# EAGLE board All-in-one Starter Kit for Micro：bit V1.0(1) (EAGLE 9.6.2)
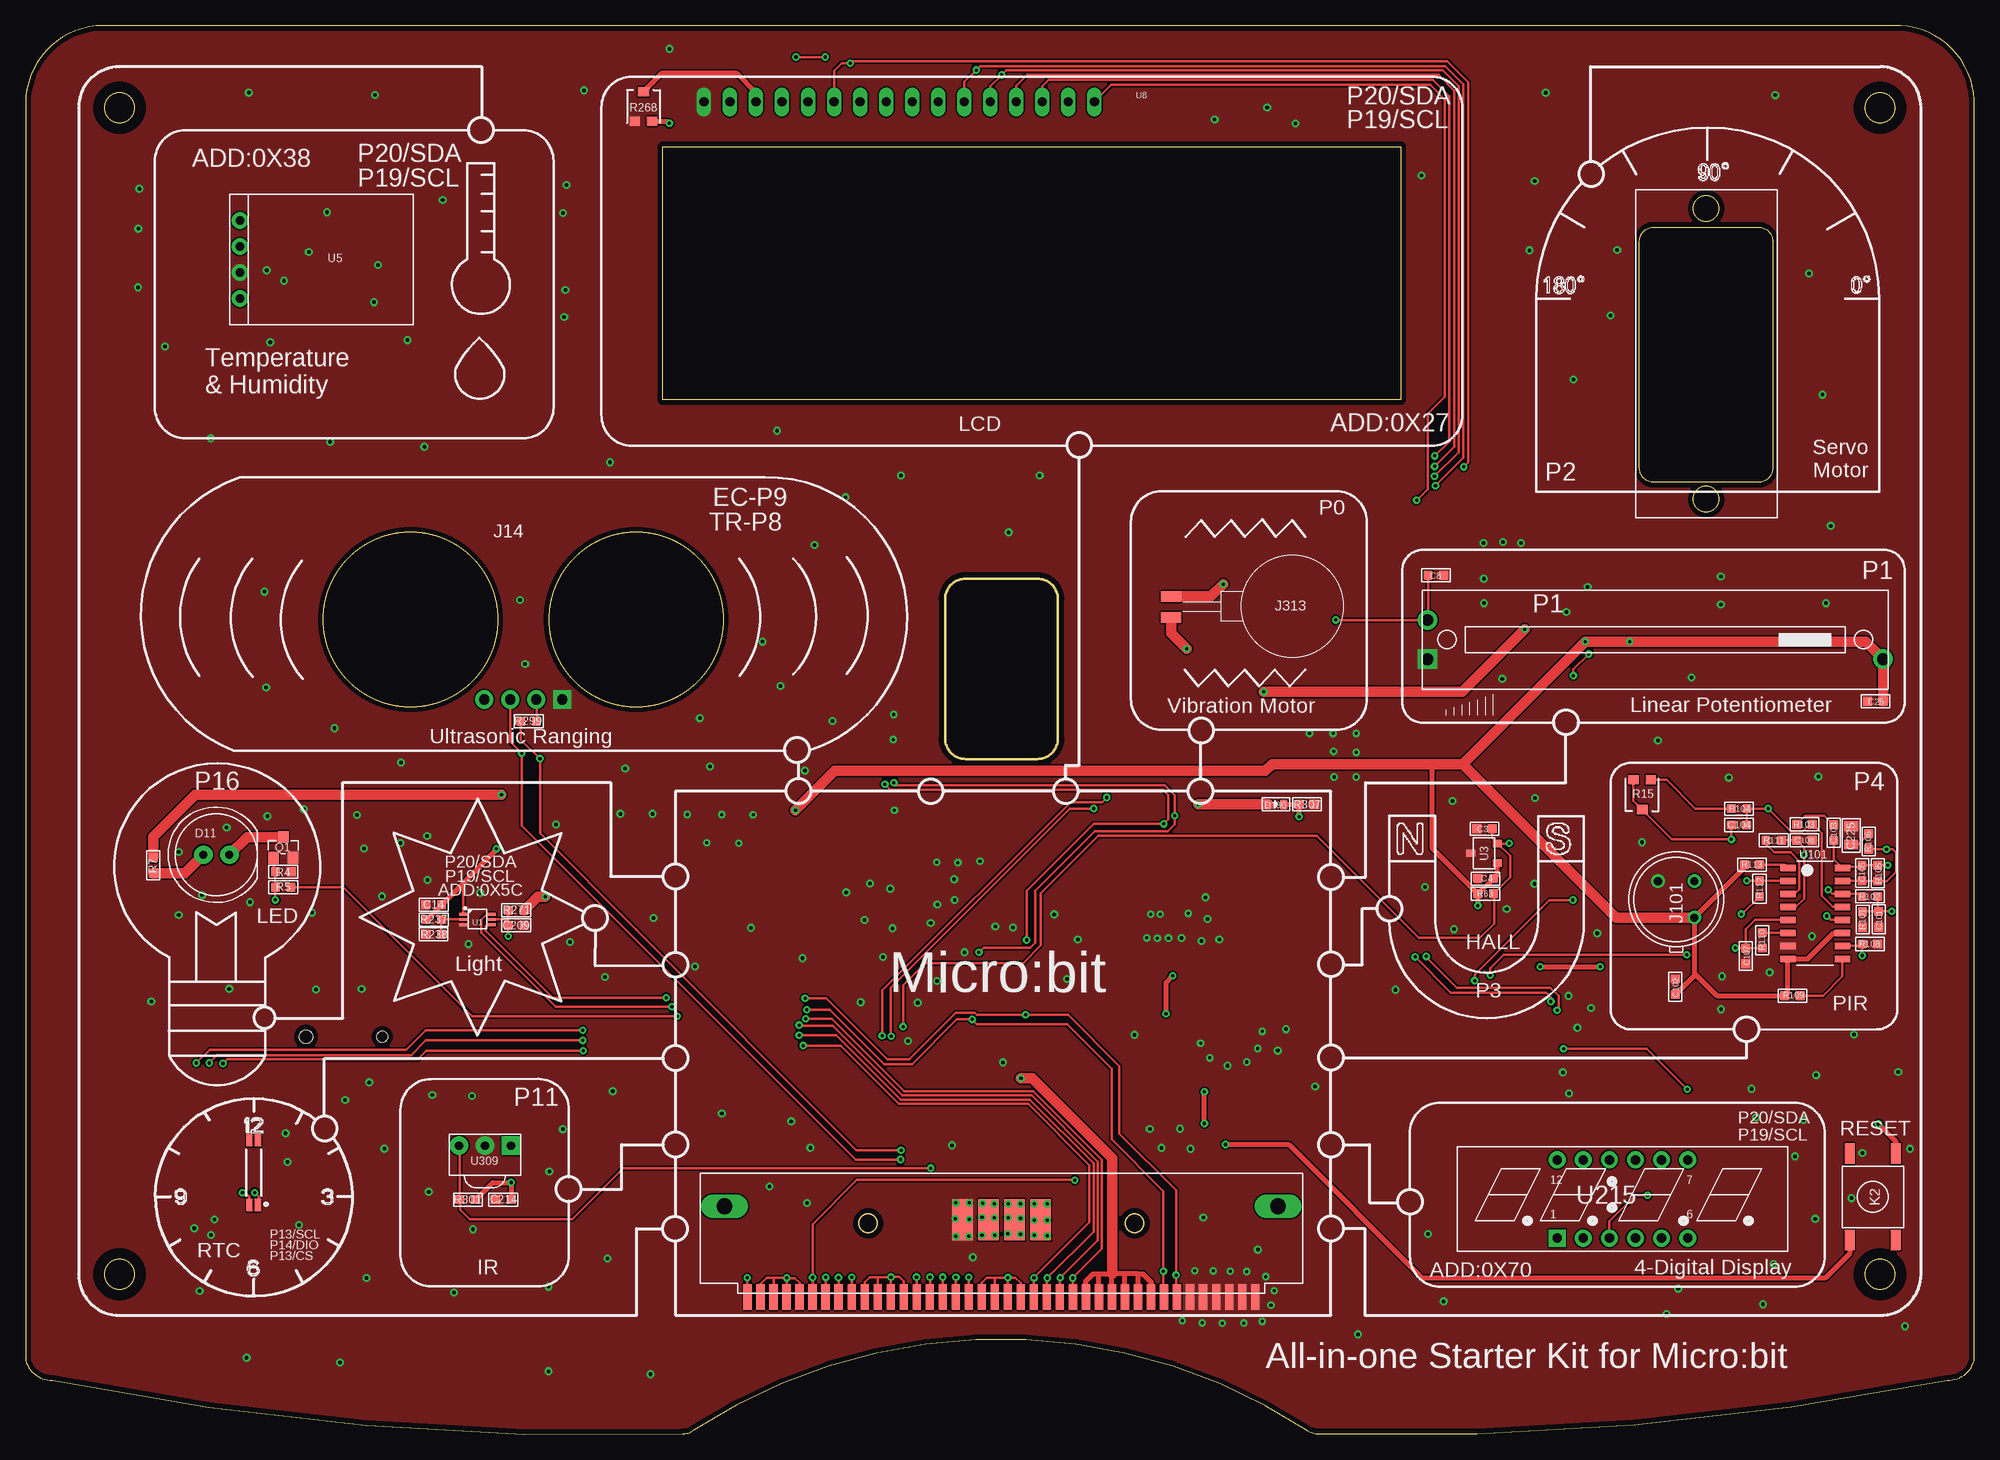
[diagram p0: board, top side]
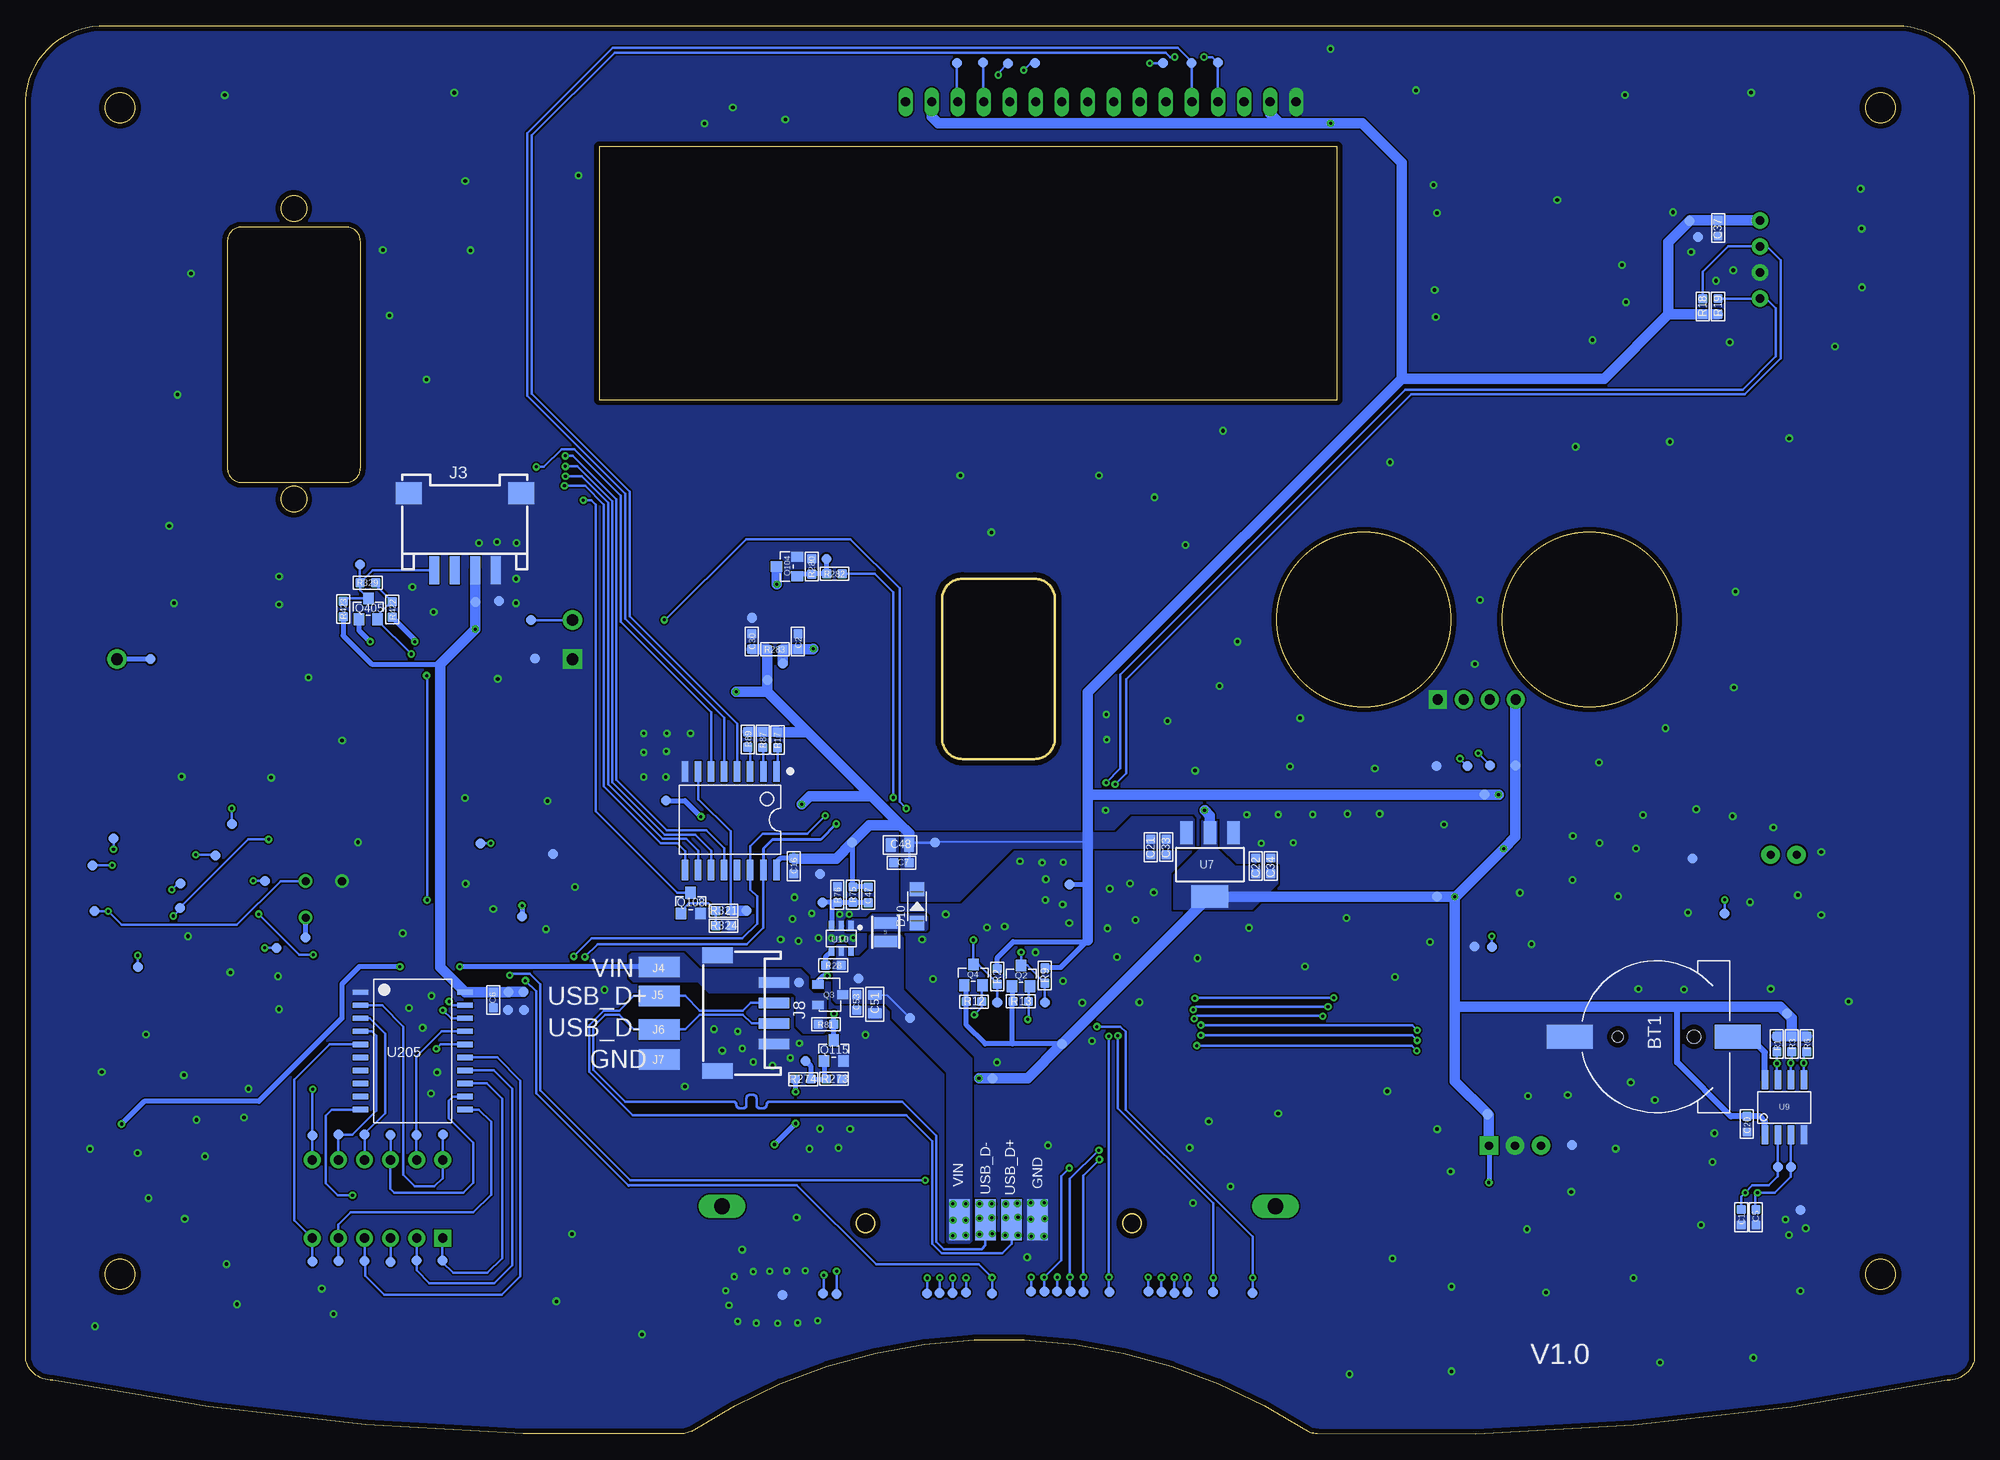
[diagram p1: board, bottom side, seen from below]

Size 190.12 x 137.4 mm. Coordinates in mm from the lower left corner, seen from the top.
Outline: 190.12,7.17 190.12,129.4 arc90 182.92,137.4 7.59,137.4 arc90 0,129.81 0,7.17 arc74 2.63,5.24 arc13 64.11,0.02 arc30 65.1,0.3 arc-66 125.16,0.28 arc30 126.16,0.02 arc13 187.46,5.24 arc74 190.12,7.17
Outline: 170.45,116.35 170.45,94.25 arc-90 169.05,92.85 158.85,92.85 arc-90 157.45,94.25 157.45,116.35 arc-90 158.85,117.75 169.05,117.75 arc-90 170.45,116.35
Outline: 89.71,81.45 89.71,67.85 arc90 91.71,65.85 98.71,65.85 arc90 100.71,67.85 100.71,81.45 arc90 98.71,83.45 91.71,83.45 arc90 89.71,81.45
Outline: circle at 9.16,15.58 radius 1.45
Outline: circle at 9.16,129.39 radius 1.45
Outline: circle at 180.92,15.58 radius 1.45
Outline: circle at 180.92,129.39 radius 1.45
Outline: circle at 163.95,91.2 radius 1.25
Outline: circle at 163.95,119.56 radius 1.25
Copper layers (1*16): Top 0.035mm / dielectric 1.5mm / Bottom 0.035mm
Design rules "default *": minimum track width 6mil, minimum drill 0.3mm, track to track 6mil, track to pad 6mil, pad to pad 6mil, via to via 6mil, smd to smd 6mil, copper to edge 20mil, drill to drill 6mil, minimum pad ring 10mil, minimum via ring 8mil, stop-mask expansion 4mil, vias tented up to drill 100mil, thermal gap 0mil
Net classes: 0 default: width 0.15 mm, drill 0.3 mm; 1 PWR: width 0.15 mm, drill 0.25 mm; 2 gnd: width 0.15 mm, drill 0.3 mm, clearance 0.152 mm
tKeepout: area 147.3,94 to 180.9,127.6
tRestrict: area 6.7,13.1 to 11.7,18.1; area 6.7,126.9 to 11.7,131.9; area 178.4,13.1 to 183.4,18.1; area 178.4,126.9 to 183.4,131.9

## Footprints (pad centres in the part's own frame; a part is rotated, then mirrored left to right if it is on the bottom)
CR1220 = smd 2.3 x 4.5: N 0,8.425; P 0,-7.975 | hole 1.3: 0,-3.725 | hole 1.05: 0,3.725
C0603 = smd 0.889 x 0.889: 1 -0.762,0; 2 0.762,0
0603 = smd 0.889 x 0.889: 1 -0.762,0; 2 0.762,0
C0805 = smd 1.016 x 1.397: 1 -0.889,0; 2 0.889,0
0805 = smd 1.016 x 1.397: 1 -0.889,0; 2 0.889,0
D_SOD123FL = smd 1.397 x 1.397: + -1.651,0; - 1.651,0
LED-8MM = drill 0.8 pad 1.8: 1 -1.27,0; 2 1.27,0
LED_0603_SMT = smd 0.762 x 0.889: 1 -0.762,0; 2 0.762,0
TP-SMD-2X4MM = smd 4 x 2: 1 0,0
A_XBJ_CONNECTOR_4P-SMD-2.0-90D = smd 1.01 x 2.74: 1 -3,-0.1; 2 -1,-0.1; 3 1,-0.1; 4 3,-0.1 | smd 2.54 x 2.184: SS1 -5.5,7.4; SS2 5.5,7.4
PH2.0-4P = smd 1 x 3: 1 -3,2.762; 2 -1,2.762; 3 1,2.762; 4 3,2.762 | smd 1.524 x 3: 5 -5.65,-2.763; 6 5.65,-2.763
CROWPI_POW_ULTRA = drill 1 pad 1.778 square: P$1 3.81,0 | drill 1 pad 1.778: P$2 1.27,0; P$3 -1.27,0; P$4 -3.81,0
MICROBIT_SMD_40P = smd 0.8 x 2.5: A1 26.03,-5.42; A2 24.76,-5.42; A3 23.49,-5.42; A4 22.22,-5.42; A5 20.95,-5.42; A6 19.68,-5.42; A7 18.41,-5.42; A8 17.14,-5.42; A9 15.87,-5.42; A10 14.6,-5.42; A11 13.33,-5.42; A12 12.06,-5.42; A13 10.79,-5.42; A14 9.52,-5.42; A15 8.25,-5.42; A16 6.98,-5.42; A17 5.71,-5.42; A18 4.44,-5.42; A19 3.17,-5.42; A20 1.9,-5.42; A21 0.63,-5.42; A22 -0.64,-5.42; A23 -1.91,-5.42; A24 -3.18,-5.42; A25 -4.45,-5.42; A26 -5.72,-5.42; A27 -6.99,-5.42; A28 -8.26,-5.42; A29 -9.53,-5.42; A30 -10.8,-5.42; A31 -12.07,-5.42; A32 -13.34,-5.42; A33 -14.61,-5.42; A34 -15.88,-5.42; A35 -17.15,-5.42; A36 -18.42,-5.42; A37 -19.69,-5.42; A38 -20.96,-5.42; A39 -22.23,-5.42; A40 -23.5,-5.42 | drill 1.524 pad 1.524 long: P$2 -25.73,3.42; P$3 28.27,3.42
3P-D8.1MM = drill 0.8: 1 1.778,1.778; 2 -1.778,1.778; 3 -1.778,-1.778
MOTOR_1CM = smd 1 x 2: P$1 1.083,-11.822; P$2 -0.956,-11.822
CLOSE_KEY_6*6 = smd 2 x 1: 1 -4.2,2.25; 2 4.2,2.25; 3 -4.2,-2.25; 4 4.2,-2.25
1008 = smd 1.1 x 2.2: 1 -0.9,0; 2 0.9,0
3P-SQUA-45.6X10X5.8H = drill 1.143 pad 1.905 square: 1 -22.225,-1.905 | drill 1.143 pad 1.905: 2 -22.225,1.905; 3 22.225,-1.905
PAD-1.0MM = smd 1 x 1: P$1 0,0
SOT23@1 = smd 1.016 x 1.143: 1 -0.95,-1.016; 2 0.95,-1.016; 3 0,1.016
SOT23 = smd 1.016 x 1.143: 1 -0.889,-1.016; 2 0.889,-1.016; 3 0,1.016
DFN8_SOT-23 = smd 1.1 x 0.8: 1 1.2,-1; 2 1.2,1 | smd 1.1 x 0.9: 3 -1.2,0
R0603 = smd 0.889 x 0.889: 1 -0.762,0; 2 0.762,0
3P-SMD-SQUA-3.6X3.3 = smd 1 x 0.9: 1 -0.85,-1.45; 3 0.85,-1.45 | smd 1.1 x 0.9: 2 0,1.45
R0603-SP = smd 0.889 x 0.889: 1 -0.762,0; 2 0.762,0
DISCRETE_R0603 = smd 0.889 x 0.889: 1 -0.762,0; 2 0.762,0
BH1750-WSOF-6 = smd 0.8 x 0.27: 1 -1.4,0.5; 2 -1.4,0; 3 -1.4,-0.5; 4 1.4,-0.5; 5 1.4,0; 6 1.4,0.5
SO-16-300MIL = smd 0.635 x 2: P$1 0,0; P$2 1.27,0; P$3 2.54,0; P$4 3.81,0; P$5 5.08,0; P$6 6.35,0; P$7 7.62,0; P$8 8.89,0; P$9 8.89,9.6; P$10 7.62,9.6; P$11 6.35,9.6; P$12 5.08,9.6; P$13 3.81,9.6; P$14 2.54,9.6; P$15 1.27,9.6; P$16 0,9.6
SOT-23W = smd 0.7 x 0.9: 1 -0.95,-1.3; 2 0.95,-1.3; 3 0,1.3
CROWTAIL-DHT20-V1.0-20211013_DHT20 = drill 0.8 pad 1.6: 1 -3.81,0; 2 -1.27,0; 3 1.27,0; 4 3.81,0
SOT223 = smd 1.219 x 2.235: 1 -2.311,-3.099; 2 0,-3.099; 3 2.311,-3.099 | smd 3.6 x 2.2: 4 0,3.099
CROWPI_POW_LCD1206 = drill 0.9 long: P$1 -16.51,3.36; P$2 -13.97,3.36; P$3 -11.43,3.36; P$4 -8.89,3.36; P$5 -6.35,3.36; P$6 -3.81,3.36; P$7 -1.27,3.36; P$8 1.27,3.36; P$9 3.81,3.36; P$10 6.35,3.36; P$11 8.89,3.36; P$12 11.43,3.36; P$13 13.97,3.36; P$14 16.51,3.36; P$15 19.05,3.36; P$16 21.59,3.36
SOP8 = smd 0.63 x 1.865: 1 -1.905,-2.683; 2 -0.635,-2.683; 3 0.635,-2.683; 4 1.905,-2.683; 5 1.905,2.682; 6 0.635,2.682; 7 -0.635,2.682; 8 -1.905,2.682
SOT23-6L = smd 0.5 x 0.9: 1 -0.961,-1.212; 2 -0.011,-1.212; 3 0.94,-1.212; 4 0.94,1.288; 5 -0.011,1.288; 6 -0.961,1.288
SOP16 = smd 0.635 x 1.524: 1 0,0; 2 1.27,0; 3 2.54,0; 4 3.81,0; 5 5.08,0; 6 6.35,0; 7 7.62,0; 8 8.89,0; 9 8.89,5.334; 10 7.62,5.334; 11 6.35,5.334; 12 5.08,5.334; 13 3.81,5.334; 14 2.54,5.334; 15 1.27,5.334; 16 0,5.334
HT16K33-SOP20 = smd 1.5 x 0.5: P$1 -5.08,5.08; P$2 -5.08,3.81; P$3 -5.08,2.54; P$4 -5.08,1.27; P$5 -5.08,0; P$6 -5.08,-1.27; P$7 -5.08,-2.54; P$8 -5.08,-3.81; P$9 -5.08,-5.08; P$10 -5.08,-6.35; P$11 5.12,-6.35; P$12 5.12,-5.08; P$13 5.12,-3.81; P$14 5.12,-2.54; P$15 5.12,-1.27; P$16 5.12,0; P$17 5.12,1.27; P$18 5.12,2.54; P$19 5.12,3.81; P$20 5.12,5.08
4-DIGITAL_DISPLAY = drill 0.889 pad 1.651 square: 1 -5.964,-4.229 | drill 0.889 pad 1.651: 2 -3.424,-4.229; 3 -0.884,-4.229; 4 1.656,-4.229; 5 4.196,-4.229; 6 6.736,-4.229; 7 6.736,3.391; 8 4.196,3.391; 9 1.656,3.391; 10 -0.884,3.391; 11 -3.424,3.391; 12 -5.964,3.391
VS1838B-SIP3 = drill 0.8 pad 1.8 square: 1 -2.54,0 | drill 0.8 pad 1.8: 2 0,0; 3 2.54,0
MC-146 = smd 1.2 x 0.6: 1 -3.15,-0.425; 2 3.15,-0.425; 3 3.15,0.425; 4 -3.15,0.425

## Placement (x,y rotation side)
BT1  CR1220  [CR1220]  31.07,38.76 90 bottom
C1  10nF/NC  [C0603]  22.76,21.15 270 bottom
C2  100nF  [C0603]  114.77,77.3 270 bottom
C3  1uF  [C0603]  142.32,59.05 180 top
C4  100nF  [C0603]  142.44,54.19 0 top
C5  10nF/NC  [C0603]  21.31,21.15 90 bottom
C6  100nF  [0603]  144.48,42.34 90 bottom
C7  1uF  [C0603]  104.68,55.75 0 bottom
C8  1uF  [C0603]  137.58,83.78 180 top
C14  1uF  [0603]  39.81,51.63 0 top
C16  100nF  [0603]  115.2,55.4 90 bottom
C20  1uF  [C0603]  22.18,30.23 270 bottom
C21  10uF  [C0603]  80.36,57.25 270 bottom
C22  10uF  [C0603]  70.1,55.43 90 bottom
C25  100nF  [C0603]  180.46,71.49 0 top
C30  100nF  [C0603]  119.27,77.32 270 bottom
C33  100nF  [C0603]  78.84,57.27 270 bottom
C34  100nF  [C0603]  68.65,55.43 90 bottom
C37  100nF  [0603]  25.01,117.65 90 bottom
C47  22pF  [C0603]  107.91,52.6 270 bottom
C48  22uF  [C0805]  104.82,57.46 0 bottom
C51  22uF  [C0805]  107.27,41.93 90 bottom
C53  1uF  [C0603]  109.05,42.11 90 bottom
C101  10nF  [C0603]  180.78,50.22 90 top
C102  10nF  [C0603]  160.94,43.64 270 top
C103  10uF  [0603]  176.39,58.67 270 top
C104  22nF  [C0603]  167.15,59.42 180 top
C105  22nF  [C0603]  179.16,54.74 270 top
C107  10nF  [C0603]  167.81,46.64 270 top
C108  10nF  [C0603]  173.55,57.94 0 top
C209  100nF  [0603]  47.86,49.63 180 top
C214  4.7uF  [0603]  46.59,22.87 0 top
C225  47uF  [0805]  178.11,58.4 270 top
D10  DSS34  [D_SOD123FL]  103.16,51.5 90 bottom
D11  RED  [LED-8MM]  18.6,56.51 0 top
D130  RED  [LED_0603_SMT]  121.97,61.42 0 top
J1  TP-SMDTP-SMD-2X4MM  [TP-SMD-2X4MM]  99.02,20.9 270 bottom
J2  TP-SMDTP-SMD-2X4MM  [TP-SMD-2X4MM]  96.48,20.9 270 bottom
J3  [A_XBJ_CONNECTOR_4P-SMD-2.0-90D]  147.26,84.39 0 bottom
J4  TP-SMDTP-SMD-2X4MM  [TP-SMD-2X4MM]  128.28,45.57 0 bottom
J5  TP-SMDTP-SMD-2X4MM  [TP-SMD-2X4MM]  128.28,42.74 0 bottom
J6  TP-SMDTP-SMD-2X4MM  [TP-SMD-2X4MM]  128.28,39.47 0 bottom
J7  TP-SMDTP-SMD-2X4MM  [TP-SMD-2X4MM]  128.28,36.53 0 bottom
J8  PH2.0-4P-WOTIE  [PH2.0-4P]  119.87,41.06 270 bottom
J9  TP-SMDTP-SMD-2X4MM  [TP-SMD-2X4MM]  93.94,20.9 270 bottom
J10  TP-SMDTP-SMD-2X4MM  [TP-SMD-2X4MM]  91.4,20.9 270 bottom
J11  TP-SMDTP-SMD-2X4MM  [TP-SMD-2X4MM]  99.02,20.9 90 top
J12  TP-SMDTP-SMD-2X4MM  [TP-SMD-2X4MM]  96.48,20.9 90 top
J13  TP-SMDTP-SMD-2X4MM  [TP-SMD-2X4MM]  93.94,20.9 90 top
J14  CROWPI_POW_ULTRA  [CROWPI_POW_ULTRA]  48.55,71.67 0 top
J15  TP-SMDTP-SMD-2X4MM  [TP-SMD-2X4MM]  91.4,20.9 90 top
J19  MICROBIT_SMD_40P  [MICROBIT_SMD_40P]  93.92,18.8 0 top
J101  LHI778  [3P-D8.1MM]  161.03,52.16 270 top
J313  MOTOR_1CN  [MOTOR_1CM]  123.58,80.76 270 top
K2  CLOSE_KEY_66  [CLOSE_KEY_6*6]  180.21,23.15 270 top
L8  4.7UH/1.8A  [1008]  106.21,48.95 90 bottom
P1  10K  [3P-SQUA-45.6X10X5.8H]  158.99,77.5 0 top
P2  PADPAD-1.0MM  [PAD-1.0MM]  103.85,40.61 90 bottom
P3  PADPAD-1.0MM  [PAD-1.0MM]  101.39,57.7 90 bottom
P4  PADPAD-1.0MM  [PAD-1.0MM]  112.38,51.84 90 bottom
P5  PADPAD-1.0MM  [PAD-1.0MM]  127.64,61.8 90 bottom
P6  PADPAD-1.0MM  [PAD-1.0MM]  88.29,53.63 0 bottom
P7  PADPAD-1.0MM  [PAD-1.0MM]  89.02,38.05 0 bottom
P8  PADPAD-1.0MM  [PAD-1.0MM]  90.66,42.12 0 bottom
P9  PADPAD-1.0MM  [PAD-1.0MM]  95.33,42.1 0 bottom
P10  PADPAD-1.0MM  [PAD-1.0MM]  70.43,13.78 0 bottom
P11  PADPAD-1.0MM  [PAD-1.0MM]  74.27,13.85 0 bottom
P12  PADPAD-1.0MM  [PAD-1.0MM]  76.79,13.87 0 bottom
P13  PADPAD-1.0MM  [PAD-1.0MM]  79.31,13.87 0 bottom
P14  PADPAD-1.0MM  [PAD-1.0MM]  80.58,13.88 0 bottom
P15  PADPAD-1.0MM  [PAD-1.0MM]  84.4,13.87 0 bottom
P16  PADPAD-1.0MM  [PAD-1.0MM]  86.9,13.86 0 bottom
P17  PADPAD-1.0MM  [PAD-1.0MM]  88.18,13.92 0 bottom
P18  PADPAD-1.0MM  [PAD-1.0MM]  89.49,13.89 0 bottom
P19  PADPAD-1.0MM  [PAD-1.0MM]  90.73,13.93 0 bottom
P20  PADPAD-1.0MM  [PAD-1.0MM]  92.03,13.93 0 bottom
P21  PADPAD-1.0MM  [PAD-1.0MM]  95.85,13.69 0 bottom
P22  PADPAD-1.0MM  [PAD-1.0MM]  98.39,13.82 0 bottom
P23  PADPAD-1.0MM  [PAD-1.0MM]  99.71,13.75 0 bottom
P24  PADPAD-1.0MM  [PAD-1.0MM]  100.94,13.76 0 bottom
P25  PADPAD-1.0MM  [PAD-1.0MM]  102.17,13.72 0 bottom
P26  PADPAD-1.0MM  [PAD-1.0MM]  95.81,34.71 0 bottom
P27  PADPAD-1.0MM  [PAD-1.0MM]  111.01,13.66 0 bottom
P28  PADPAD-1.0MM  [PAD-1.0MM]  112.33,13.71 0 bottom
P29  PADPAD-1.0MM  [PAD-1.0MM]  116.3,13.58 0 bottom
P30  PADPAD-1.0MM  [PAD-1.0MM]  114.68,44.05 0 bottom
P31  PADPAD-1.0MM  [PAD-1.0MM]  108.89,44.44 0 bottom
P32  PADPAD-1.0MM  [PAD-1.0MM]  114.02,36.41 0 bottom
P36  PADPAD-1.0MM  [PAD-1.0MM]  44.77,65.23 0 bottom
P37  PADPAD-1.0MM  [PAD-1.0MM]  47.23,65.21 0 bottom
P38  PADPAD-1.0MM  [PAD-1.0MM]  49.46,65.16 0 bottom
P39  PADPAD-1.0MM  [PAD-1.0MM]  52.47,65.15 0 bottom
P40  PADPAD-1.0MM  [PAD-1.0MM]  47.81,62.39 0 bottom
P41  PADPAD-1.0MM  [PAD-1.0MM]  18.26,41.02 0 bottom
P42  PADPAD-1.0MM  [PAD-1.0MM]  24.35,50.76 0 bottom
P43  PADPAD-1.0MM  [PAD-1.0MM]  27.51,56.16 0 bottom
P45  PADPAD-1.0MM  [PAD-1.0MM]  16.96,21.84 0 bottom
P46  PADPAD-1.0MM  [PAD-1.0MM]  19.17,26.05 0 bottom
P47  PADPAD-1.0MM  [PAD-1.0MM]  17.89,26.05 0 bottom
P48  PADPAD-1.0MM  [PAD-1.0MM]  47.49,31.2 0 bottom
P49  PADPAD-1.0MM  [PAD-1.0MM]  52.42,52.44 0 bottom
P50  PADPAD-1.0MM  [PAD-1.0MM]  39.27,28.18 0 bottom
P51  PADPAD-1.0MM  [PAD-1.0MM]  47.08,47.52 0 bottom
P52  PADPAD-1.0MM  [PAD-1.0MM]  48.76,47.57 0 bottom
P54  PADPAD-1.0MM  [PAD-1.0MM]  27.79,118.35 0 bottom
P55  PADPAD-1.0MM  [PAD-1.0MM]  109.48,57.71 0 bottom
P56  PADPAD-1.0MM  [PAD-1.0MM]  26.95,116.77 0 bottom
P57  PADPAD-1.0MM  [PAD-1.0MM]  112.63,54.64 0 bottom
P58  PADPAD-1.0MM  [PAD-1.0MM]  73.81,133.79 0 bottom
P59  PADPAD-1.0MM  [PAD-1.0MM]  76.35,133.74 0 bottom
P60  PADPAD-1.0MM  [PAD-1.0MM]  79.14,133.78 0 bottom
P61  PADPAD-1.0MM  [PAD-1.0MM]  119.81,51.06 0 bottom
P62  PADPAD-1.0MM  [PAD-1.0MM]  91.63,133.75 0 bottom
P63  PADPAD-1.0MM  [PAD-1.0MM]  94.29,133.72 0 bottom
P64  PADPAD-1.0MM  [PAD-1.0MM]  96.72,133.8 0 bottom
P65  PADPAD-1.0MM  [PAD-1.0MM]  99.28,133.74 0 bottom
P66  PADPAD-1.0MM  [PAD-1.0MM]  117.75,73.55 0 bottom
P67  PADPAD-1.0MM  [PAD-1.0MM]  119.26,79.64 0 bottom
P68  PADPAD-1.0MM  [PAD-1.0MM]  111.99,85.37 0 bottom
P69  PADPAD-1.0MM  [PAD-1.0MM]  116.25,75.19 0 bottom
P70  PADPAD-1.0MM  [PAD-1.0MM]  141.68,50.49 0 bottom
P71  PADPAD-1.0MM  [PAD-1.0MM]  138.69,56.61 0 bottom
P72  PADPAD-1.0MM  [PAD-1.0MM]  145.76,57.62 0 bottom
P73  PADPAD-1.0MM  [PAD-1.0MM]  143,43.12 0 bottom
P74  PADPAD-1.0MM  [PAD-1.0MM]  143.04,41.39 0 bottom
P75  PADPAD-1.0MM  [PAD-1.0MM]  151.99,29.19 0 bottom
P76  PADPAD-1.0MM  [PAD-1.0MM]  162.13,29.13 0 bottom
P77  PADPAD-1.0MM  [PAD-1.0MM]  157.04,16.89 0 bottom
P78  PADPAD-1.0MM  [PAD-1.0MM]  151.97,16.93 0 bottom
P79  PADPAD-1.0MM  [PAD-1.0MM]  149.45,16.92 0 bottom
P80  PADPAD-1.0MM  [PAD-1.0MM]  154.53,29.18 0 bottom
P81  PADPAD-1.0MM  [PAD-1.0MM]  159.6,16.89 0 bottom
P82  PADPAD-1.0MM  [PAD-1.0MM]  154.52,16.81 0 bottom
P83  PADPAD-1.0MM  [PAD-1.0MM]  141.55,43.13 0 bottom
P84  PADPAD-1.0MM  [PAD-1.0MM]  149.42,29.21 0 bottom
P85  PADPAD-1.0MM  [PAD-1.0MM]  157.07,29.21 0 bottom
P86  PADPAD-1.0MM  [PAD-1.0MM]  159.6,29.21 0 bottom
P87  PADPAD-1.0MM  [PAD-1.0MM]  162.13,16.81 0 bottom
P88  PADPAD-1.0MM  [PAD-1.0MM]  141.52,41.36 0 bottom
P89  PADPAD-1.0MM  [PAD-1.0MM]  177.92,75.6 0 bottom
P90  PADPAD-1.0MM  [PAD-1.0MM]  140.81,79.39 0 bottom
P91  PADPAD-1.0MM  [PAD-1.0MM]  140.41,75.65 0 bottom
P92  PADPAD-1.0MM  [PAD-1.0MM]  146.25,81.17 0 bottom
P93  PADPAD-1.0MM  [PAD-1.0MM]  157.51,84.82 0 bottom
P94  PADPAD-1.0MM  [PAD-1.0MM]  143.92,81.27 0 bottom
P95  PADPAD-1.0MM  [PAD-1.0MM]  183.39,51.01 0 bottom
P96  PADPAD-1.0MM  [PAD-1.0MM]  166.75,53.96 0 bottom
P97  PADPAD-1.0MM  [PAD-1.0MM]  162.8,48.42 0 bottom
P98  PADPAD-1.0MM  [PAD-1.0MM]  179.16,45.58 0 bottom
P99  PADPAD-1.0MM  [PAD-1.0MM]  175.07,51.32 0 bottom
P100  PADPAD-1.0MM  [PAD-1.0MM]  183.59,55.48 0 bottom
P101  PADPAD-1.0MM  [PAD-1.0MM]  170.01,59.51 0 bottom
P102  PADPAD-1.0MM  [PAD-1.0MM]  174.99,53.7 0 bottom
P103  PADPAD-1.0MM  [PAD-1.0MM]  181.53,58.11 0 bottom
P104  PADPAD-1.0MM  [PAD-1.0MM]  171.6,56.44 0 bottom
P105  PADPAD-1.0MM  [PAD-1.0MM]  165.63,47.42 0 bottom
P106  PADPAD-1.0MM  [PAD-1.0MM]  78.06,13.78 0 bottom
Q1  S9013  [SOT23@1]  25.15,57.23 0 top
Q2  2N7002  [SOT23]  93.01,44.7 0 bottom
Q3  PMOS-3401-4A  [DFN8_SOT-23]  111.61,42.85 180 bottom
Q4  2N7002  [SOT23]  97.66,44.8 0 bottom
Q104  S9013  [SOT23@1]  115.85,84.63 90 bottom
Q108  S9013  [SOT23@1]  125.25,51.79 0 bottom
Q115  S9013  [SOT23@1]  111.28,37.4 0 bottom
Q405  2N7002  [SOT23]  156.69,80.51 0 bottom
R1  4.7K  [R0603]  19.26,38.04 270 bottom
R2  4.7K  [R0603]  95.32,44.65 270 bottom
R3  4.7K  [R0603]  17.8,38.04 270 bottom
R4  10K  [R0603]  25.14,54.86 180 top
R5  1K  [R0603]  25.13,53.36 0 top
R6  4.7K  [R0603]  16.35,38.04 270 bottom
R7  470R  [R0603]  12.46,55.49 270 top
R9  4.7K  [R0603]  90.67,44.74 270 bottom
R12  4.7K  [R0603]  97.59,42.19 0 bottom
R13  4.7K  [R0603]  93.04,42.2 0 bottom
R15  500K  [3P-SMD-SQUA-3.6X3.3]  157.71,62.37 180 top
R17  10K  [R0603]  116.77,67.72 270 bottom
R18  4.7K/NC  [R0603]  26.49,109.99 90 bottom
R19  4.7K/NC  [R0603]  25.01,110.01 90 bottom
R28  10K  [R0603-SP]  111.33,45.73 180 bottom
R63  5.1K  [R0603]  142.44,52.7 180 top
R75  120K 1%  [R0603-SP]  109.41,52.61 90 bottom
R76  15K 1%  [R0603-SP]  110.92,52.62 270 bottom
R81  10K  [DISCRETE_R0603]  112.04,39.97 180 bottom
R87  10K  [R0603]  118.22,67.74 270 bottom
R89  10K  [R0603]  119.66,67.75 270 bottom
R101  10K  [R0603]  179.21,50.19 90 top
R102  0R  [R0603]  179.92,52.45 0 top
R103  1K  [R0603]  173.54,59.48 0 top
R104  130K  [R0603]  167.17,61.03 0 top
R105  1M_1%  [R0603]  180.69,54.72 270 top
R106  3.3K  [R0603]  179.81,57.81 270 top
R108  1M  [R0603]  179.93,47.81 180 top
R109  10K  [R0603]  172.38,42.77 0 top
R110  4.7M  [R0603]  169.42,48.18 90 top
R111  10K  [R0603]  170.55,57.94 0 top
R112  2K  [R0603]  169.16,53.2 90 top
R113  10K  [R0603]  168.42,55.54 0 top
R237  10K  [R0603]  39.82,50.19 180 top
R238  NC  [R0603]  39.81,48.75 0 top
R268  10K  [3P-SMD-SQUA-3.6X3.3]  60.27,129.51 0 top
R271  10K  [R0603]  47.86,51.09 180 top
R273  10K  [R0603]  111.26,34.64 180 bottom
R274  1K  [R0603]  114.25,34.63 180 bottom
R280  10K  [R0603]  113.42,84.64 270 bottom
R282  1K  [R0603]  111.2,83.92 180 bottom
R283  22R  [R0603]  117,76.55 0 bottom
R299  2K  [R0603]  49.08,69.52 180 top
R301  10K  [R0603]  43.14,22.87 180 top
R307  4.7K  [R0603]  125,61.43 0 top
R321  1K  [R0603]  122.03,51.05 0 bottom
R324  10K  [R0603]  122.02,49.59 0 bottom
R329  NC  [R0603]  156.74,83.06 0 bottom
R422  4.7k  [R0603]  154.36,80.43 270 bottom
R423  4.7K  [R0603]  159.15,80.49 90 bottom
U1  [BH1750-WSOF-6]  44.08,50.2 0 top
U2  PCF8574DWR(UMW)  [SO-16-300MIL]  116.89,64.64 180 bottom
U3  HAL248  [SOT-23W]  142.28,56.66 90 top
U5  DHT20  [CROWTAIL-DHT20-V1.0-20211013_DHT20]  20.92,114.59 270 top
U7  LD1117-3V3-SOT223  [SOT223]  74.58,55.55 180 bottom
U8  CROWPI_POW_LCD1602  [CROWPI_POW_LCD1206]  82.68,126.61 0 top
U9  DS1302  [SOP8]  18.54,31.86 0 bottom
U10  SX1308  [SOT23-6L]  110.56,48.4 180 bottom
U101  BIS0001  [SOP16]  171.92,55.24 270 top
U205  HT16K33-20P  [HT16K33-SOP20]  152.36,38.01 0 bottom
U215  YY2841AS-33  [4-DIGITAL_DISPLAY]  155.4,23.35 0 top
U309  IR-3PSIP3  [VS1838B-SIP3]  44.81,28.13 180 top
Y1  SSP-T7-F-32.768KHZ  [MC-146]  22.25,25.51 90 top

## Library data of the parts
BT1 = CR1220; AVAILABILITY: In Stock; CHECK_PRICES: https://www.snapeda.com/parts/S8411-45R/Harwin+Inc./view-part/?ref=eda; DESCRIPTION: Coin Cell Battery Retainer, Horizontal SMT, for CR1220 Coin Cell Batteries, Tape & Reeled; MF: Harwin; MP: S8411-45R; PACKAGE: None; PRICE: None; PURCHASE-URL: https://www.snapeda.com/api/url_track_click_mouser/?unipart_id=424412&manufacturer=Harwin&part_name=S8411-45R&search_term=cr1220; SNAPEDA_LINK: https://www.snapeda.com/parts/S8411-45R/Harwin+Inc./view-part/?ref=snap
C1-C5 C8 C25 C30 C101 C102 C104 C105 C107 C108 P1 Q1 Q104 Q108 Q115 R4 R5 R7 R15 R63 R101-R106 R108-R113 R268 R273 R274 = Discrete
C6 C14 C16 C37 C209 C214 C225 D130 R1-R3 R6 R9 R12 R13 R17-R19 R87 R89 R237 R238 R271 R280 R282 R283 R299 R301 R307 R321 R324 = cooper
C7 C21 C22 C33 C34 C47 C48 C51 C53 R28 R75 R76 = LoraWAN_Gateway_Mainboard
C20 D10 U10 = CrowPanel_Advance_HMI
C103 = A_xbj
D11 J1 J2 J4-J7 J9-J13 J15 U1 U5 U309 = Crowtail_Starter
J3 J8 Q3 = CrowPanel ESP32 Display-4.3-inch-V2.1-20240314
J14 U8 = Crowtail_Starter_V0.2
J19 = MY_LIB
J101 U101 = PIR_motion_sensor
J313 P2-P32 P36-P43 P45-P52 P54-P106 U205 U215 = crowpi_pow
K2 L8 U9 Y1 = WGH
Q2 Q4 Q405 = discrete
R81 = Crowtail-_LED-V2.0-20190615-01
R329 R422 R423 U2 = Brian
U3 = IC
U7 = Lora_Basic_Gateway_ Module

## Nets
1IN+: P102.P$1 R102.1 U101.14
1IN-: C105.2 P103.P$1 R105.2 R106.2 U101.15
1OUT: C103.2 C105.1 P100.P$1 R105.1 U101.16
2IN-: C104.1 P101.P$1 R103.2 R104.2 U101.13
2OUT: C104.2 P99.P$1 R15.2 R15.3 U101.12
5V: C2.2 J313.P$1 P69.P$1 R283.2
A: P75.P$1 U205.P$17 U215.11
B: P76.P$1 U205.P$16 U215.7
BIT_P0.02_VIB: J19.A36 J19.A37 J19.A38 J19.A39 P11.P$1 R282.1
BIT_P0.03_ROTARY: C8.2 J19.A28 J19.A29 J19.A30 J19.A31 P1.2 P15.P$1 P90.P$1
BIT_P0.04_SERVO: J19.A19 J19.A20 J19.A21 J19.A22 P21.P$1 Q405.2 R329.2 R422.1
BIT_P0.09_ECHO: J19.A26 P17.P$1 P38.P$1 R299.2
BIT_P0.10_TRIG: J14.P$3 J19.A27 P16.P$1 P37.P$1
BIT_P0.11: J19.A32 P14.P$1
BIT_P0.12: J19.A23 P20.P$1
BIT_P0.14: J19.A34 P106.P$1
BIT_P0.23_IR: J19.A24 P19.P$1 R301.2 U309.3
BIT_P0.28_PIR: J19.A35 P12.P$1 R112.1
BIT_P0.30: J19.A25 P18.P$1
BIT_P0.31_HAL: C3.1 J19.A40 P10.P$1 P72.P$1 R63.1 U3.2
BIT_P1.02_LED: J19.A15 P25.P$1 R5.2
BIT_P1.05: J19.A33 P13.P$1
BIT_SCL_H: P8.P$1 Q2.3 R9.2 R19.2 U2.P$14 U5.4 U205.P$18
BIT_SCL_P0.26: J19.A8 P27.P$1 Q2.2 R13.2 U1.6
BIT_SDA_H: P9.P$1 Q4.3 R2.2 R18.2 U2.P$15 U5.2 U205.P$19
BIT_SDA_P1.00: J19.A7 P28.P$1 Q4.2 R12.2 U1.4
BIT_SPI_MISO_P0.01: J19.A17 P23.P$1 R3.2 U9.6
BIT_SPI_MOSI_P0.13_CS: J19.A16 P24.P$1 R6.2 U9.5
BIT_SPI_SCK_P0.17: J19.A18 P22.P$1 R1.2 U9.7
BUTTON: P32.P$1 Q115.1 R273.2 R274.1
C: P77.P$1 U205.P$15 U215.4
D: P78.P$1 U205.P$14 U215.2
DB4: P62.P$1 U2.P$9 U8.P$11
DB5: P63.P$1 U2.P$10 U8.P$12
DB6: P64.P$1 U2.P$11 U8.P$13
DB7: P65.P$1 U2.P$12 U8.P$14
DIG1: P84.P$1 U205.P$2 U215.12
DIG2: P85.P$1 U205.P$3 U215.9
DIG3: P86.P$1 U205.P$4 U215.8
DIG4: P87.P$1 U205.P$5 U215.6
DP: P82.P$1 U205.P$10 U215.3
DVI: C209.2 P51.P$1 R271.2 U1.5
E: P79.P$1 U205.P$13 U215.1
E_LCD: P60.P$1 U2.P$6 U8.P$6
F: P80.P$1 U205.P$12 U215.10
FB: C47.2 P4.P$1 R75.1 R76.2 U10.3
G: P81.P$1 U205.P$11 U215.5
GND: BT1.N C1.2 C2.1 C3.2 C4.1 C5.1 C6.1 C7.1 C8.1 C14.1 C16.1 C20.2 C21.2 C22.2 C25.1 C30.1 C33.2 C34.2 C37.1 C48.1 C51.1 C53.1 C101.1 C102.1 C107.2 C108.2 C209.1 C214.1 C225.1 J3.4 J3.SS1 J3.SS2 J7.1 J8.4 J8.5 J8.6 J10.1 J14.P$1 J15.1 J19.A1 J19.A2 J19.A3 J19.A4 J19.A5 J19.A6 J101.3 P1.1 P29.P$1 P39.P$1 P43.P$1 P45.P$1 P50.P$1 P52.P$1 P56.P$1 P57.P$1 P67.P$1 P71.P$1 P74.P$1 P88.P$1 P91.P$1 P94.P$1 Q1.2 Q104.2 Q108.2 Q115.2 R4.1 R76.1 R101.1 R108.1 R238.1 R268.1 R273.1 R280.1 R307.2 R324.2 U1.3 U2.P$8 U3.3 U5.3 U7.1 U8.P$1 U9.4 U10.2 U101.7 U205.P$1 U309.2
IB: P98.P$1 R108.2 U101.10
LED: P42.P$1 Q1.1 R4.2 R5.1
LIGHT: P61.P$1 R321.2 U2.P$7
N$1: R111.1 U101.3
N$2: Q108.1 R321.1 R324.1
N$3: C225.2 R106.1
N$4: D10.+ L8.2 U10.1
N$5: Q3.1 Q115.3 R81.1
N$6: R28.2 U10.4
N$7: R268.2 U8.P$3
N$8: K2.4 R274.2
N$9: BT1.P U9.8
N$10: R17.2 U2.P$1
N$11: R87.2 U2.P$2
N$12: R89.2 U2.P$3
N$15: D11.2 Q1.3
N$16: D11.1 R7.2
N$20: Q108.3 U8.P$16
N$25: R110.2 U101.6
N$29: R109.2 U101.9
N$35: C103.1 R103.1
N$37: R113.2 U101.1
N$39: R15.1 R104.1
N$48: J313.P$2 Q104.3
N$258: R237.1 R238.2 U1.2
N$278: J14.P$2 R299.1
OSC0: C5.2 P47.P$1 U9.3 Y1.4
OSC1: C1.1 P46.P$1 U9.2 Y1.1
PIR: P96.P$1 R112.2 U101.2
RC1: C108.1 P104.P$1 R111.2 U101.4
RC2: C107.1 P105.P$1 R110.1 U101.5
RED: D130.2 P5.P$1 R307.1
RS: P58.P$1 U2.P$4 U8.P$4
RW: P59.P$1 U2.P$5 U8.P$5
S: C101.2 J101.2 P95.P$1 R101.2 R102.2
SEN_3V3: C4.2 C14.2 C20.1 C22.1 C25.2 C34.1 C102.2 C214.2 J14.P$4 J19.A9 J19.A10 J19.A11 J19.A12 J19.A13 J19.A14 J101.1 P1.3 P7.P$1 P26.P$1 P36.P$1 P41.P$1 P48.P$1 P49.P$1 P70.P$1 P89.P$1 P97.P$1 Q2.1 Q4.1 Q405.1 R1.1 R3.1 R6.1 R12.1 R13.1 R63.2 R109.1 R113.1 R237.2 R271.1 R301.1 R422.2 U1.1 U3.1 U7.2 U7.4 U9.1 U101.8 U101.11 U309.1
SERVO: J3.1 P93.P$1 Q405.3 R329.1 R423.2
USB_D_N: J2.1 J6.1 J8.3 J12.1
USB_D_P: J5.1 J8.2 J9.1 J13.1
VBUS: J4.1 J8.1 K2.1 P30.P$1 Q3.2 R81.2
VCC_5V: C6.2 C7.2 C16.2 C21.1 C30.2 C33.1 C37.2 C47.1 C48.2 D10.- D130.1 J3.3 P3.P$1 P6.P$1 P40.P$1 P54.P$1 P55.P$1 P66.P$1 P73.P$1 P83.P$1 P92.P$1 R2.1 R7.1 R9.1 R17.1 R18.1 R19.1 R75.2 R87.1 R89.1 R268.3 R283.1 R423.1 U2.P$16 U5.1 U7.3 U8.P$2 U8.P$15 U205.P$20
VIB: P68.P$1 Q104.1 R280.2 R282.2
VIN: C51.2 C53.2 J1.1 J11.1 L8.1 P2.P$1 P31.P$1 Q3.3 R28.1 U10.5

## Tracks (layer width: path | path; a pad name or v marks a point on that pad's centre or on a via)
1IN+  (via drill 0.3 pad 0.7)
  Top 0.254: v175.87,53.1 176.28,52.7 U101.14 178.91,52.7 179.02,52.58 R102.1
  Bottom 0.254: v175.87,53.1 175.28,53.7 P102.P$1
1IN-  (via drill 0.3 pad 0.7)
  Top 0.254: U101.15 179.16,53.97 C105.2 179.18,53.95 R105.2 181.59,53.95 182.51,54.87 182.51,56.69 182.15,57.04 v181.55,57.04 R106.2
  Bottom 0.254: P103.P$1 181.55,58.09 v181.55,57.04
1OUT  (via drill 0.3 pad 0.7)
  Top 0.254: C103.2 176.39,56.1 U101.16 177.35,55.33 178.99,55.33 C105.1 179.18,55.48 R105.1 v181.68,55.48
  Bottom 0.254: v181.68,55.48 P100.P$1
2IN-  (via drill 0.3 pad 0.7)
  Top 0.254: U101.13 176.32,51.43 175.22,52.53 175.22,58.6 174.34,59.48 R103.2 174.06,59.48 173.31,58.74 172.27,58.74 170.01,61 v170.01,61.03 R104.2 167.93,59.44 C104.1
  Bottom 0.254: P101.P$1 v170.01,61.02 v170.01,61.03
2OUT  (via drill 0.3 pad 0.7)
  Top 0.254: U101.12 176.09,50.16 v175.71,50.54 | C104.2 166.39,58.04 v166.42,58.01 160.62,58.01 R15.2 156.86,61.77 R15.3
  Bottom 0.254: v175.71,50.54 175.07,51.17 P99.P$1 168.38,58.01 v166.42,58.01
5V  (via drill 0.3 pad 0.7)
  Top 1: J313.P$1 111.76,78.11 v113.26,76.61
  Bottom 1: v113.26,76.61 v113.27,76.61 113.33,76.55 114.77,76.55 C2.2 R283.2 116.25,76.54 P69.P$1
A
  Bottom 0.254: U205.P$17 149.55,39.28 151.99,36.83 P75.P$1 151.99,26.75 U215.11
B  (via drill 0.3 pad 0.7)
  Top 0.254: v150.04,37.58 158.17,37.58 v162.12,33.63
  Bottom 0.254: U205.P$16 149.62,38.01 v150.04,37.58 | v162.12,33.63 162.16,33.59 162.16,29.16 P76.P$1 U215.7
BIT_P0.02_VIB  (via drill 0.3, 0.3 pad 0.7)
  Top 0.254: J19.A37 74.23,15.21 | v83.56,38.87 83.59,38.9 83.59,43.3 101.95,61.66 105.04,61.66 v105.48,62.1 | 74.23,15.21 v74.26,15.23 73.01,15.23 | J19.A39 71.69,14.64 72.29,15.23 73.01,15.23 | J19.A36 75.5,14.75 75.05,15.21 74.23,15.21 | J19.A38 72.96,15.19 73.01,15.23
  Bottom 0.254: P11.P$1 74.26,13.86 v74.26,15.23 74.26,22.5 83.56,31.8 v83.56,38.87 | v105.48,62.1 105.48,82.12 107.28,83.92 R282.1
BIT_P0.03_ROTARY  (via drill 0.3 pad 0.7)
  Top 0.254: J19.A29 84.39,15.28 | 84.39,15.28 84.39,15.33 85.23,15.33 85.66,14.89 J19.A28 | 84.39,15.28 v84.43,15.31 83.11,15.31 | v84.45,38.82 84.4,38.87 84.4,43.53 101.89,61.02 v104.2,61.02 | v127.82,79.42 127.83,79.41 P1.2 136.82,79.46 C8.2 | J19.A31 81.85,14.8 82.37,15.31 83.11,15.31 | J19.A30 83.12,15.29 83.11,15.31
  Bottom 0.254: P15.P$1 84.43,13.89 v84.43,15.31 84.43,38.8 v84.45,38.82 | v104.2,61.02 104.85,61.67 104.85,82.49 109.67,87.32 119.82,87.32 127.72,79.42 v127.82,79.42 | P90.P$1 136.78,79.39 P1.2
BIT_P0.04_SERVO  (via drill 0.3, 0.3 pad 0.7)
  Top 0.254: v95.83,15.26 v95.82,15.26 J19.A20 | v141.36,44.24 141.36,44.83 148.63,52.1 v150.96,52.1 | v95.83,15.26 96.57,15.26 97.09,14.74 J19.A19 | v152.51,76.1 151.01,74.6 v151.01,74 | 94.56,15.26 93.77,15.26 93.28,14.78 J19.A22 | 94.56,15.26 v95.83,15.26 | J19.A21 94.55,15.26 94.56,15.26
  Bottom 0.254: R329.2 155.97,82.82 R422.1 154.46,81.2 155.8,79.85 Q405.2 155.8,79.39 v152.51,76.1 | P21.P$1 95.83,13.71 v95.83,15.26 97.12,16.55 107.16,16.55 114.9,24.29 131.34,24.29 | v141.36,44.24 140.32,43.2 140.32,33.27 131.34,24.29 | 131.29,24.24 131.34,24.29 | v150.96,52.1 150.96,73.95 v151.01,74
BIT_P0.09_ECHO  (via drill 0.3, 0.3 pad 0.7)
  Top 0.254: R299.2 48.32,67.76 v50.18,65.9 50.18,58.59 59.57,49.2 59.55,49.2 81.06,27.7 v85.41,27.7 | v88.23,15.31 88.23,13.41 J19.A26
  Bottom 0.254: P17.P$1 88.23,13.97 v88.23,15.31 88.23,24.9 85.43,27.7 v85.41,27.7 | P38.P$1 v50.18,65.89 v50.18,65.9
BIT_P0.10_TRIG  (via drill 0.3, 0.3 pad 0.7)
  Top 0.254: J14.P$3 47.28,67.52 v48.39,66.42 48.39,59.37 80.97,26.78 v85.36,26.78 | J19.A27 86.93,15.29 v86.92,15.31
  Bottom 0.254: P16.P$1 86.92,13.87 v86.92,15.31 86.92,25.22 v85.36,26.78 | P37.P$1 47.23,65.26 v48.39,66.42
BIT_P0.11  (via drill 0.3 pad 0.7)
  Top 0.254: J19.A32 v80.58,15.29 v80.59,15.29
  Bottom 0.254: v80.59,15.29 P14.P$1
BIT_P0.12  (via drill 0.3 pad 0.7)
  Top 0.254: J19.A23 92.01,15.3 v92.02,15.3
  Bottom 0.254: P20.P$1 v92.02,15.3
BIT_P0.14  (via drill 0.3 pad 0.7)
  Top 0.254: J19.A34 78.04,15.27 v78.06,15.28
  Bottom 0.254: v78.06,15.28 P106.P$1
BIT_P0.23_IR  (via drill 0.3)
  Top 0.254: U309.3 42.37,28.03 R301.2 42.38,21.88 43.31,20.95 53.31,20.95 58.31,25.95 v88.31,25.95 | J19.A24 90.74,15.29 v90.76,15.3
  Bottom 0.254: P19.P$1 90.76,13.95 v90.76,15.3 89.11,16.95 89.11,25.15 v88.31,25.95
BIT_P0.28_PIR  (via drill 0.3, 0.3 pad 0.7)
  Top 0.254: v76.78,15.27 v76.77,15.27 J19.A35 | R112.1 167.45,50.73 v167.39,50.73 | v142.9,44.77 142.9,45.42 144.23,46.75 v162.05,46.75 | 85.26,24.8 102.32,24.8 v102.35,24.77
  Top 0.255: v76.78,15.27 76.78,20.47 81.11,24.8 85.26,24.8
  Bottom 0.254: v76.78,15.27 76.78,13.88 P12.P$1 | v167.39,50.73 163.41,46.75 v162.05,46.75 | v142.9,44.77 142.75,44.92 140.95,44.92 139.92,43.89 139.92,33.55 131.14,24.77 v102.35,24.77
BIT_P0.30  (via drill 0.3 pad 0.7)
  Top 0.254: J19.A25 89.47,15.3 v89.48,15.31
  Bottom 0.254: P18.P$1 v89.48,15.31
BIT_P0.31_HAL  (via drill 0.3, 0.3 pad 0.7)
  Top 0.254: R63.1 143.26,52.75 | 143.26,52.75 144.82,54.32 144.82,56.4 143.62,57.61 U3.2 | J19.A40 70.42,15.22 v70.4,15.24 | v85.61,39.75 85.61,43.78 87.77,45.95 97.31,45.95 99.06,47.7 99.06,52.75 104.66,58.35 125.96,58.35 135.91,48.4 141.85,48.4 143.26,49.8 143.26,52.75 | U3.2 143.09,58.1 C3.1 | U3.2 144.71,57.61 v144.74,57.64
  Bottom 0.254: P10.P$1 70.4,13.81 v70.4,15.24 70.4,19.24 82.81,31.65 82.81,39.25 83.31,39.75 v85.61,39.75 | v144.74,57.64 145.74,57.64 P72.P$1
BIT_P1.02_LED  (via drill 0.3 pad 0.7)
  Top 0.254: R5.2 31,53.36 43.59,40.77 v63.58,40.77 | J19.A15 102.17,15.22 v102.17,15.22 105.01,18.06 105.01,26.75 98.31,33.45 85.71,33.45 78.65,40.5 v76.12,40.5
  Bottom 0.254: v63.58,40.77 63.62,40.8 75.82,40.8 v76.12,40.5 | v102.17,15.22 P25.P$1
BIT_P1.05  (via drill 0.3 pad 0.7)
  Top 0.254: J19.A33 79.31,15.25 v79.3,15.26
  Bottom 0.254: v79.3,15.26 v79.31,15.26 P13.P$1
BIT_SCL_H  (via drill 0.3, 0.3 pad 0.7)
  Top 0.152: v112.11,60.32 v112.11,60.33
  Top 0.254: v84.71,63.54 v84.71,63.53 84.96,63.29 111.13,63.29 112.11,62.31 v112.11,60.32 112.11,59.5 111.41,58.8 104.31,58.8 98.51,53 98.51,47.95 98.01,47.45 93.46,47.45 v93.01,47 | v136.66,46.6 136.66,46.5 139.61,43.55 148.76,43.55 149.56,42.75 149.56,41.5 v149.41,41.35
  Bottom 0.254: R19.2 U5.4 20.29,110.78 19.36,109.85 19.36,105.15 22.61,101.9 55.51,101.9 83.31,74.1 83.31,64.95 v84.71,63.54 | U205.P$18 148.61,40.55 v149.41,41.35 | v112.11,60.33 113.89,58.55 118.21,58.55 119.43,57.33 U2.P$14 119.43,53.12 118.76,52.45 118.76,49.8 120.21,48.35 134.91,48.35 v136.66,46.6 | P8.P$1 90.67,42.13 R9.2 92.41,45.71 Q2.3 v93.01,47
BIT_SCL_P0.26  (via drill 0.3, 0.3 pad 0.7)
  Top 0.254: v63.06,41.68 51.71,41.68 44.47,48.93 44.47,50.18 44.99,50.7 U1.6 | J19.A8 111.01,13.44 v111.01,15.88 111.01,23.71 105.96,28.76 105.96,35.65 101.61,40 92.81,40 v92.36,40.45 90.86,40.45 86.51,36.1 83.76,36.1 78.45,41.4 v76.21,41.4
  Bottom 0.254: v63.06,41.68 75.93,41.68 v76.21,41.4 | v111.01,15.88 P27.P$1 | v92.36,40.45 92.28,40.53 R13.2 92.28,43.52 Q2.2
BIT_SDA_H  (via drill 0.3, 0.3 pad 0.7)
  Top 0.254: v83.84,63.39 84.35,62.88 110.92,62.88 111.48,62.32 111.48,59.96 v111.03,59.52 111.01,59.55 104.21,59.55 97.66,53 v97.66,48.2 | v135.56,46.55 139.06,43.05 148.36,43.05 148.81,42.6 v148.81,42.2
  Bottom 0.254: R18.2 26.49,113.38 24.02,115.86 U5.2 20.27,115.86 18.91,114.5 18.91,104.95 22.41,101.45 54.96,101.45 82.76,73.65 82.76,64.47 v83.84,63.39 | P9.P$1 95.33,43.88 R2.2 95.32,43.96 97.17,45.81 Q4.3 v97.66,48.2 | U2.P$15 118.16,49.4 119.76,47.8 134.31,47.8 v135.56,46.55 | v148.81,42.2 148.81,42.15 148.48,41.82 U205.P$19
  Bottom 0.305: v111.03,59.52 112.56,58 117.26,58 118.16,57.1 U2.P$15
BIT_SDA_P1.00  (via drill 0.3, 0.3 pad 0.7)
  Top 0.254: J19.A7 112.24,13.47 v112.24,15.5 112.24,23.78 106.71,29.32 106.71,35.9 101.71,40.9 v97.56,40.9 92.8,40.9 92.62,41.08 90.74,41.08 86.21,36.55 84.08,36.55 78.12,42.51 v76.04,42.51 | U1.4 45.03,49.7 44.88,49.54 44.88,49.11 51.41,42.57 v62.49,42.57
  Bottom 0.254: v62.49,42.57 75.98,42.57 v76.04,42.51 | v112.24,15.5 112.24,13.8 P28.P$1 | v97.56,40.9 96.83,41.63 R12.2 96.83,43.72 Q4.2
BIT_SPI_MISO_P0.01  (via drill 0.3, 0.3 pad 0.7)
  Top 0.254: J19.A17 99.63,15.19 v99.67,15.22 104.19,19.75 104.19,26.41 97.97,32.64 85.37,32.64 79.11,38.9 v75.46,38.9 | v54.36,38.4 39.06,38.4 37.61,36.95 18.66,36.95 v17.91,36.2
  Bottom 0.254: P23.P$1 99.67,13.78 v99.67,15.22 | U9.6 v17.91,36.2 17.8,36.3 R3.2 | v75.46,38.9 54.86,38.9 v54.36,38.4
BIT_SPI_MOSI_P0.13_CS  (via drill 0.3, 0.3 pad 0.7)
  Top 0.254: v54.36,39.4 39.06,39.4 37.14,37.48 26.81,37.48 26.79,37.5 17.96,37.5 v16.66,36.2 | J19.A16 100.9,15.22 v100.93,15.25 104.6,18.92 104.6,26.58 98.14,33.04 85.54,33.04 78.74,39.84 75.51,39.84 v75.46,39.89
  Bottom 0.254: P24.P$1 100.93,13.77 v100.93,15.25 | v75.46,39.89 54.85,39.89 v54.36,39.4 | U9.5 16.64,36.18 v16.66,36.2 16.66,36.97 R6.2
BIT_SPI_SCK_P0.17  (via drill 0.3, 0.3 pad 0.7)
  Top 0.254: J19.A18 98.38,13.39 v98.38,15.23 103.79,20.64 103.79,26.24 97.8,32.23 85.2,32.23 79.53,37.9 v75.86,37.9 | v54.41,37.4 39.11,37.4 38.25,36.54 19.65,36.54 v19.26,36.15
  Bottom 0.254: P22.P$1 98.38,13.83 v98.38,15.23 | v75.86,37.9 54.91,37.9 v54.41,37.4 | U9.7 19.26,34.63 v19.26,36.15 R1.2
BUTTON
  Bottom 0.5: 112.31,34.63 R274.1 113.49,35.88 P32.P$1 | 112.31,34.63 R273.2 | Q115.1 112.23,34.71 112.31,34.63
C
  Bottom 0.254: U205.P$15 144.13,36.74 141.88,34.49 141.88,15.37 143.65,13.6 155.13,13.6 156.99,15.45 156.99,16.84 P77.P$1 157.04,19.1 U215.4
D
  Bottom 0.254: U205.P$14 144.45,35.47 142.65,33.66 142.65,16.48 144.42,14.7 150.72,14.7 151.97,15.96 P78.P$1 U215.2
DB4  (via drill 0.3 pad 0.7)
  Top 0.254: v137.54,92.51 140.27,95.24 140.27,131.71 138.52,133.45 93.12,133.45 v92.74,133.07 91.57,131.91 U8.P$11
  Bottom 0.254: v137.54,92.51 135.54,92.51 133.7,90.67 133.7,63.2 128.15,57.65 126.56,57.65 125.78,56.87 U2.P$9 | P62.P$1 92.06,133.75 v92.74,133.07
DB5  (via drill 0.3 pad 0.7)
  Top 0.254: v137.45,93.43 139.8,95.79 139.8,131.47 138.24,133.04 95.67,133.04 v95.22,132.59 94.11,131.48 U8.P$12
  Bottom 0.254: v137.45,93.43 135.89,93.43 133.29,90.84 133.29,63.4 127.96,58.06 125.67,58.06 124.51,56.9 U2.P$10 | v95.22,132.59 95.22,132.78 P63.P$1
DB6  (via drill 0.3 pad 0.7)
  Top 0.254: v137.45,94.4 139.37,96.32 139.37,131.07 137.84,132.6 97.73,132.6 96.65,131.52 U8.P$13
  Bottom 0.254: v137.45,94.4 136.28,94.4 132.89,91.01 132.89,63.58 127.77,58.46 124.77,58.46 123.24,56.93 U2.P$11 | P64.P$1 96.67,133.75 96.67,129.99 U8.P$13
DB7  (via drill 0.3 pad 0.7)
  Top 0.254: v137.49,95.42 138.88,96.81 138.88,130.52 137.29,132.11 99.82,132.11 99.19,131.49 U8.P$14
  Bottom 0.254: v137.49,95.42 136.73,95.42 132.48,91.18 132.48,63.81 127.57,58.9 123.71,58.9 121.97,57.16 U2.P$12 | P65.P$1 99.28,130.06 U8.P$14
DIG1
  Bottom 0.254: U205.P$2 155.35,41.82 153.29,39.75 153.29,25.29 152.15,24.16 150.24,24.16 149.44,24.96 U215.12 149.42,26.76 P84.P$1
DIG2
  Bottom 0.254: U205.P$3 156.55,40.55 155.05,39.05 155.05,31.29 157.07,29.27 P85.P$1 157.06,29.21 U215.9
DIG3
  Bottom 0.254: U205.P$4 156.37,39.28 155.93,38.83 155.93,31.54 158.25,29.21 P86.P$1 U215.8
DIG4
  Bottom 0.254: U205.P$5 160.44,38.01 163.89,34.55 163.89,20.87 U215.6 P87.P$1
DP  (via drill 0.3 pad 0.7)
  Top 0.254: v158.23,23.28 158.19,23.32 157.08,23.32 154.52,20.76 U215.3
  Bottom 0.254: U205.P$10 160.25,31.66 160.85,31.06 160.85,24.46 159.67,23.28 v158.23,23.28 | P82.P$1 U215.3
DVI  (via drill 0.3 pad 0.7)
  Top 0.254: v47.09,48.57 47.1,48.58 C209.2 47.1,50.22 | 47.1,50.22 R271.2 | U1.5 47.07,50.2 47.1,50.22
  Bottom 0.254: v47.09,48.57 P51.P$1
E
  Bottom 0.254: U205.P$13 145.12,34.2 143.64,32.71 143.64,17.14 145.07,15.71 148.41,15.71 149.46,16.77 P79.P$1 149.45,19.11 U215.1
E_LCD  (via drill 0.3 pad 0.7)
  Top 0.254: v140.31,94.35 140.74,94.78 140.74,131.88 138.68,133.95 80.67,133.95 v80.46,133.74 | v80.46,133.74 79.61,133.74 78.87,133 U8.P$6 | v80.45,133.73 v80.46,133.74
  Bottom 0.254: P60.P$1 79.18,133.73 v80.45,133.73 | v140.31,94.35 139.56,94.35 137.81,96.1 136.61,96.1 132.06,91.55 132.06,79.25 123.24,70.43 U2.P$6
F
  Bottom 0.254: P80.P$1 154.52,29.16 U215.10 154.56,26.7 154.56,23.95 154.16,23.55 147.44,23.55 146.47,24.52 146.47,28.43 148.85,30.81 148.85,32.54 148.46,32.93 U205.P$12
FB
  Bottom 0.5: C47.2 109.4,51.84 R75.1 R76.2 111.48,51.86 | 111.48,51.86 112.37,51.86 P4.P$1 | 111.48,51.86 111.49,51.85 111.5,51.84 U10.3
G
  Bottom 0.254: U205.P$11 145.9,31.66 144.72,30.47 144.72,23.37 146.45,21.63 158.4,21.63 159.6,20.44 U215.5 P81.P$1
GND  (via drill 0.3, 0.35)
  Top 0.152: J15.1 91.4,21.91 v90.76,22.55 | J15.1 91.3,21 v90.71,21 | J15.1 90.76,20.26 v90.76,19.3 | J15.1 91.4,19.91 v92.01,19.3 | J15.1 91.45,20.95 v92.06,20.95 | J15.1 92.06,21.56 v92.06,22.55
  Bottom 0.152: J15.1 91.4,21.91 v90.76,22.55
  other vias: 21.78,130.86 34.08,130.64 11.09,121.49 11,117.6 10.95,111.87 13.61,106.11 23.87,106.51 25.2,112.52 34,110.42 29.4,119.2 40.69,120.38 52.77,121.86 52.42,119.13 52.65,111.6 52.54,108.98 117.26,35.93 18.06,97.14 29.71,96.81 38.9,96.32 57.01,94.81 23.3,82.19 23.46,72.83 30.13,68.86 36.63,65.51 48.73,75.13 48.24,81.37 65.78,69.84 76.97,86.73 71.88,77.31 73.65,72.97 79.99,91.39 73.31,97.88 85.39,93.5 27.63,115.32 23.52,113.54 34.37,114.04 37.26,106.72 78.71,69.57 76.02,64.72 66.76,65.12 58.49,64.92 23.58,60.27 27.14,60.95 19.62,59.17 14.94,56.79 17.22,52.57 14.94,50.63 21.9,51.89 27.93,50.86 32.33,60.4 33.02,57.12 34.77,52.46 39.21,54.05 36.57,57.67 39.17,58.35 44.34,52.8 43.2,47.79 19.86,43.43 28.32,43.36 12.27,42.2 33.53,34.31 31.18,32.58 32.78,43.42 51.75,59.46 58.02,60.5 61.15,60.5 16.45,20.07 25.37,29.35 25.55,26.54 26.67,20.4 18.43,20.93 18.1,19.41 16.98,13.94 21.57,7.44 30.68,6.97 33.25,15.23 92.41,17.25 35,27.84 39.67,33.08 43.54,32.97 39.33,23.63 43.66,19.98 41.79,13.8 51,14.37 56.76,17.13 51,6.11 60.97,5.83 51.09,25.62 52.41,29.74 90.38,28.17 57.28,33.44 76.22,22.54 72.56,24.16 67.92,31.26 74.69,30.51 76.56,27.93 53.11,48.01 56.53,44.59 61.27,50.34 65.3,45.62 70.77,49.38 75.78,46.42 81.47,42.12 82.38,53.71 81.84,50.15 84.57,49.33 90.59,54.12 88.95,51.66 115.1,52.36 94.6,49.52 87.03,42.07 113.65,27.83 95.35,36.26 86.08,38.33 96.32,49.41 108.19,38.94 112.62,29.78 110.81,27.92 109.68,29.75 114.9,21.12 120.21,17.98 129.99,9.72 138.35,12.95 136.83,19.5 160.09,11.71 161.23,14.18 169.49,12.66 183.36,10.51 170.52,16.57 174.6,21 178.12,23.01 172.63,27.09 179.19,27.41 183.84,27.82 168.83,30.89 173.45,30.66 168.37,33.68 174.69,35.01 178.38,38.97 182.7,35.33 150.57,33.23 149.97,35.29 151.39,39.63 152.72,41.55 150.52,42.75 165.41,41.44 165.5,44.66 170.15,45.04 174.28,48.56 153.33,48.86 139.36,49.25 136.51,53.37 144.5,51.23 147.19,53.69 139.2,61.76 147.27,62.04 157.69,57.74 159.24,67.65 166.16,64.04 174.9,64.13 162.52,73.81 144.06,73.67 142.27,83.44 142.23,86.93 152.4,82.65 150.31,80.2 144.13,87.03 142.28,81.06 145.89,86.92 165.39,80.92 165.39,83.66 175.64,81.06 176.11,88.6 175.29,101.4 151,102.88 154.61,109.12 155.27,115.52 146.73,115.48 147.23,122.25 173.98,113.22 148.3,130.85 170.7,130.62 123.89,127.85 136.17,122.79 116.01,128.24 121.13,129.42 62.82,135.14 54.48,131.09 98.93,93.5 95.91,87.97 110.7,50.72 109.77,50.72 109.39,48.4 110.42,48.38 111.5,48.38 113.43,50.79 114.63,38.13 115.52,36.69 119.12,36.3 120.21,37.61 120.65,39.28 67.91,60.43 70.97,60.41 69.58,57.65 66.46,57.69 64.54,60.44 88.89,55.79 90.63,52.1 90.95,55.75 93.11,55.88 114.07,15.92 115.88,15.91 117.53,15.89 119.13,15.85 120.99,15.36 121.82,13.97 121.5,12.57 120.65,10.99 118.83,10.82 116.74,10.8 114.79,10.84 112.84,11.06 125.26,68.35 127.56,68.35 129.81,68.35 127.61,66.6 127.66,64.1 129.81,64.1 129.81,66.5 80.06,52.85 84.36,53.2 83.66,46.55 88.31,49.85 91.61,47 88.91,44.2 102.66,48.25 101.61,44.4 100.36,50.7 116.46,48.25 114.71,48.1 112.76,48.4 133.66,43.35 115.31,50.25 122.16,37.4 122.96,39.5 125.81,33.9 84.71,70.2 84.66,67.75 84.76,60.85
  pour Top (rank 2): -12.57,150.65 -12.57,-4.85 198.32,-4.85 203.37,-4.85 203.37,148.69 203.37,150.66 -12.56,150.66
  pour Bottom (rank 2): -12.59,150.71 -12.59,-4.85 203.28,-4.85 203.28,150.71
IB  (via drill 0.3 pad 0.7)
  Top 0.254: U101.10 178.98,47.62 R108.2 179.17,46.71 v179.19,46.69
  Bottom 0.254: v179.19,46.69 179.19,45.61 P98.P$1
LED  (via drill 0.3 pad 0.7)
  Top 0.254: Q1.1 24.2,55.03 R4.2 R5.1 24.37,52.12 v24.36,52.11
  Bottom 0.254: v24.36,52.11 P42.P$1
LIGHT
  Bottom 0.254: U2.P$7 124.51,61.95 121.34,58.79 121.34,51.13 R321.2
  Bottom 1: R321.2 121.26,51.06 P61.P$1
N$1
  Top 0.254: U101.3 172.59,52.7 173.05,53.16 173.05,55.9 172.21,56.74 170.58,56.74 169.79,57.53 R111.1
N$2
  Bottom 0.254: R324.1 122.79,49.6 R321.1 123.51,51.76 125.43,51.76 126.2,50.99 Q108.1
N$3
  Top 0.254: R106.1 178.76,57.51 C225.2
N$4
  pour Bottom: 102.11,50.45 102.11,49.25 102.31,49.05 109.11,49.05 109.16,49 109.96,49 110.01,49.05 110.01,50.1 109.86,50.25 107.96,50.25 107.46,50.75 102.41,50.75
N$5  (via drill 0.3)
  Top 0.5: v111.26,41 111.26,44.05 v111.91,44.7
  Bottom 0.5: v111.26,41 111.27,40.98 R81.1 Q115.3 | v111.91,44.7 112.31,44.7 112.81,44.2 Q3.1
N$6
  Bottom 0.5: U10.4 112.09,46.52 R28.2
N$7
  Top 0.5: R268.2 62.11,132.8 69.31,132.8 71.25,130.85 U8.P$3
N$8  (via drill 0.3)
  Top 0.5: v117.06,28.25 117.11,28.2 123.26,28.2 136.26,15.2 175.56,15.2 177.96,17.6 K2.4 | v115.01,30.3 v115.01,33.4
  Bottom 0.5: v117.06,28.25 v115.01,30.3 | v115.01,33.4 115.01,34.63 R274.2
N$9
  Bottom 0.6: U9.8 20.45,37.24 21.97,38.76 BT1.P
N$10
  Bottom 0.254: R17.2 116.77,64.76 U2.P$1
N$11
  Bottom 0.254: U2.P$2 118.16,66.92 R87.2
N$12
  Bottom 0.254: U2.P$3 119.43,66.75 R89.2
N$15
  Top 1: D11.2 21.6,58.25 Q1.3
N$16
  Top 1: R7.2 15.54,54.72 D11.1
N$20  (via drill 0.3 pad 0.7)
  Top 0.254: U8.P$16 105.94,131.63 137.02,131.63 138.47,130.18 138.47,101.19 136.79,99.52 136.79,92.19 v135.7,91.1
  Bottom 0.254: Q108.3 126.55,52.81 134.51,60.78 134.51,90.69 134.93,91.1 v135.7,91.1
N$25
  Top 0.254: U101.6 169.47,48.89 R110.2
N$29
  Top 0.254: R109.2 175.38,42.77 177.26,44.64 U101.9
N$35
  Top 0.254: R103.1 173.62,60.32 175.5,60.32 C103.1
N$37
  Top 0.254: U101.1 171.62,55.54 R113.2
N$39
  Top 0.254: R104.1 162.91,61.03 160.11,63.82 R15.1
N$48  (via drill 0.3 pad 0.7)
  Top 1: J313.P$2 115.64,81.71 v116.83,82.9
  Bottom 1: v116.83,82.9 116.83,84.6 Q104.3
N$258
  Top 0.254: R238.2 R237.1 U1.2
N$278
  Top 0.254: R299.1 49.85,71.64 J14.P$2
OSC0  (via drill 0.3)
  Top 0.254: v21.16,23.55 21.46,23.55 21.83,23.18 Y1.4
  Bottom 0.254: U9.3 P47.P$1 17.89,25.11 19.46,23.55 v21.16,23.55 21.36,23.35 21.36,21.96 C5.2
OSC1  (via drill 0.3)
  Top 0.254: Y1.1 22.74,22.42 22.74,23.17 v22.36,23.55
  Bottom 0.254: U9.2 P46.P$1 19.17,25.13 20.06,24.25 21.66,24.25 v22.36,23.55 22.76,23.15 C1.1
PIR  (via drill 0.3 pad 0.7)
  Top 0.254: U101.2 R112.2 169.15,53.98 v167.92,53.98
  Bottom 0.254: P96.P$1 166.77,53.98 v167.92,53.98
RC1  (via drill 0.3 pad 0.7)
  Top 0.254: U101.4 172.7,51.43 173.52,52.24 v173.52,56.5 173.52,57.21 C108.1 R111.2
  Bottom 0.254: P104.P$1 171.66,56.5 v173.52,56.5
RC2  (via drill 0.3 pad 0.7)
  Top 0.254: C107.1 169.41,47.41 R110.1 | C107.1 167.81,49.24 168.72,50.16 U101.5 | C107.1 167.78,47.43 v166.79,47.43
  Bottom 0.254: v166.79,47.43 P105.P$1
RED  (via drill 0.3)
  Top 0.5: D130.2 R307.1 | v124.24,60.24 R307.1 | R307.1
  Bottom 0.5: P5.P$1 125.81,61.8 v124.24,60.24
RS  (via drill 0.3)
  Top 0.254: v78.01,134.34 v75.16,134.34
  Bottom 0.254: U8.P$4 73.81,129.99 P58.P$1 74.36,134.34 v75.16,134.34 | U2.P$4 120.7,69.3 131.17,79.77 131.17,91.94 140.74,101.51 140.74,126.69 132.67,134.76 132.67,134.77 78.88,134.77 78.45,134.34 v78.01,134.34
RW
  Bottom 0.254: U8.P$5 76.35,129.99 P59.P$1 76.35,133.87 77.73,135.24 132.86,135.24 141.18,126.93 141.18,101.28 131.61,91.71 131.61,79.54 121.97,69.89 U2.P$5
S  (via drill 0.3 pad 0.7)
  Top 0.254: R101.2 179.24,50.98 C101.2 | C101.2 180.68,51.08 R102.2 | C101.2 v182.06,50.98 v182.07,50.99
  Bottom 0.254: P95.P$1 183.38,50.99 v182.07,50.99 180.76,49.68 169.51,49.68 165.25,53.94 J101.2
SEN_3V3  (via drill 0.3, 0.3 pad 0.7)
  Top 0.254: U1.1 42.68,53.73 42.78,53.83
  Top 0.5: R237.2 39.14,50.19 C14.2 42.78,53.83 45.94,56.99 v45.94,57.09 | C214.2 v47.36,24.54 45.57,24.54 R301.1 | R63.2 143.17,54.19 C4.2 143.58,54.57 U3.1 | R63.2 v141.68,51.56 v141.69,51.55 | R63.2 137.21,57.17 137.21,65.1 137.46,65.35 | R113.1 167.66,55.24 J101.1 162.8,44.97 | 162.8,44.97 165.01,42.77 R109.1 171.92,43.07 U101.8 173.87,46.35 176.41,48.89 U101.11 | 162.8,44.97 162.8,44.73 C102.2 | J19.A14 103.44,14.91 104.15,15.62 104.67,15.62 | 104.67,15.62 105.99,15.62 | 105.99,15.62 106.02,15.62 107.21,15.62 | 108.49,15.62 108.99,15.62 109.79,14.82 J19.A9 | J19.A13 104.71,15.58 104.67,15.62 | J19.A10 108.52,15.59 108.49,15.62 | 108.49,15.62 107.21,15.62 | J19.A12 105.98,15.61 105.99,15.62 | J19.A11 107.25,15.57 107.21,15.62
  Top 1: v50.69,52.43 49.97,52.43 R271.1 | 140.2,65.35 137.46,65.35 121.61,65.35 120.96,64.7 78.94,64.7 v75.11,60.86 | 140.2,65.35 v152.16,77.31 v156.51,77.31 179.5,77.31 P1.3 C25.2 | 140.2,65.35 155.17,50.38 J101.1 | 106.02,15.62 106.02,26.88 98.21,34.7 v97.11,34.7
  Bottom 0.152: v156.5,77.31 v156.51,77.31
  Bottom 0.5: U309.1 v47.35,24.54 v47.36,24.54 | Q405.1 157.58,78.39 v156.5,77.31 | v152.16,77.31 152.16,77.47 R422.2 | P89.P$1 P1.3 | v141.69,51.55 P70.P$1 | P97.P$1 J101.1 | Q2.1 93.8,43.59 R13.1 93.86,42.14 93.86,38.05 | Q4.1 98.35,43.59 R12.1 98.35,39.89 96.51,38.05 93.86,38.05 | P7.P$1 93.86,38.05
  Bottom 0.6: U9.1 20.45,30.49 20.96,31 C20.1 23.75,30.99 29.01,36.25 29.01,41.68
  Bottom 1: v50.69,52.43 v50.7,52.44 P49.P$1 74.56,52.44 U7.4 88.98,38.05 P7.P$1 92.37,34.71 P26.P$1 v97.1,34.71 v97.11,34.7 | v50.69,52.43 50.6,52.43 v45.94,57.09 44.77,58.25 P36.P$1 44.77,71.64 J14.P$4 | v50.69,52.43 50.69,41.64 | 50.69,41.64 50.69,34.43 47.49,31.24 P48.P$1 47.39,31.09 47.39,28.17 U309.1 | U7.2 74.58,60.33 v75.11,60.86 | 50.69,41.64 50.65,41.68 29.01,41.68 18.94,41.68 18.27,41.01 P41.P$1 17.8,40.56 R3.1 | R3.1 R6.1 | R1.1 R3.1
  pour Bottom: 73.85,59.82 73.85,57.05 72.18,55.39 67.96,55.39 67.96,55.38 67.96,53.75 70.5,51.21 78.12,51.21 78.12,54.49 75.38,57.23 75.38,59.82
SERVO
  Bottom 0.254: R423.2 158.87,81.53 Q405.3 157.5,82.34 157.5,82.78 | 157.5,82.78 R329.1 156.27,84.29 J3.1 | P93.P$1 157.51,82.79 157.5,82.78
USB_D_N  (via drill 0.3)  (1 unrouted)
  Top 0.152: J12.1 96.48,21.83 v95.86,22.45 | J12.1 95.81,20.23 v95.81,19.55 | J12.1 96.48,20.08 v97.06,19.5 | J12.1 96.91,20.9 v97.06,21.05 | J12.1 97.06,21.48 v97.06,22.45 | J12.1 96.28,21.1 v95.86,21.1
  Bottom 0.254: J8.3 119.3,40.06 120.15,40.9 124.34,40.9 125.78,39.47 J6.1 130.79,39.47 132.23,40.9 133.57,40.9 134.73,39.74 134.73,35.53 131.64,32.44 121.09,32.44 arc90 120.77,32.12 120.77,32.11 arc-90 120.45,31.79 120.11,31.79 arc-90 119.79,32.11 119.79,32.77 arc90 119.48,33.09 119.13,33.09 arc90 118.82,32.77 118.82,32.11 arc-90 118.5,31.79 118.16,31.79 arc-90 117.84,32.11 117.84,32.12 arc90 117.52,32.44 104.6,32.44 101.26,29.1 101.26,18.75 100.56,18.05 96.86,18.05 96.48,18.43 J12.1
USB_D_P  (via drill 0.3)  (1 unrouted)
  Top 0.152: J13.1 93.94,21.92 v93.36,22.5 | J13.1 93.69,21.15 v93.31,21.15 | J13.1 93.31,20.27 v93.31,19.4 | J13.1 93.94,20.02 v94.56,19.4 | J13.1 94.31,20.9 v94.51,21.1 | J13.1 94.51,21.47 v94.51,22.45
  Bottom 0.254: J8.2 119.4,42.06 120.15,41.31 124.34,41.31 125.78,42.74 J5.1 130.79,42.74 132.23,41.31 133.74,41.31 135.14,39.91 135.14,35.34 130.91,31.11 104.22,31.11 101.66,28.55 101.66,18.58 100.73,17.64 94.86,17.64 93.94,18.57 J13.1
VBUS  (via drill 0.3)
  Top 0.5: v147.76,45.6 v153.61,45.6 | K2.1 182.46,28.55 v180.76,30.25
  Bottom 0.5: J4.1 147.73,45.57 v147.76,45.6 | v153.61,45.6 157.56,45.6 159.26,43.9 159.26,40.55 167.36,32.45 178.56,32.45 v180.76,30.25
  pour Bottom: 112.01,42.6 112.01,39.45 112.36,39.1 114.21,39.1 114.96,39.85 114.96,42.75 115.26,43.05 123.41,43.05 124.51,44.15 130.81,44.15 131.21,44.55 131.21,46.65 130.96,46.9 125.96,46.9 124.41,45.35 114.56,45.35 113.76,44.55 113.76,43.45 113.26,42.95 112.36,42.95
VCC_5V  (via drill 0.3)
  Top 0.5: R268.3 62.62,128.06 v62.81,127.87
  Top 1: R7.1 12.46,58.27 16.54,62.36 v46.43,62.36 | v114.41,61.45 114.44,61.42 D130.1 | v120.81,72.4 140.16,72.4 146.25,78.5 v146.25,78.53
  Bottom 0.152: 86.48,57.79 101.47,57.79 101.56,57.7
  Bottom 0.254: P3.P$1 101.56,57.7 103.69,57.7 C48.2 103.92,57.44 C7.2
  Bottom 0.5: C47.1 107.92,53.38 R75.2 109.41,57.64 P55.P$1 | R423.1 159.15,77.9 156.35,75.1 149.68,75.1 | C16.2 116.52,56.16 116.89,55.79 U2.P$16 | 86.48,48.19 86.64,48.03 | 86.64,48.03 89.17,45.5 R9.1 | R2.1 95.32,46.49 93.78,48.03 86.64,48.03 | P6.P$1 86.51,53.63 86.48,53.6
  Bottom 1: R19.1 26.47,109.25 R18.1 29.85,109.23 | 29.85,109.23 29.87,109.26 29.87,116.28 P54.P$1 27.73,118.41 C37.2 20.93,118.41 U5.1 | 55.88,102.98 55.88,124.03 59.72,127.87 v62.81,127.87 67.79,127.87 | 67.79,127.87 68.71,128.79 U8.P$2 | 67.79,127.87 101.1,127.87 101.73,128.5 U8.P$15 | 86.48,62.38 47.85,62.38 47.85,62.39 P40.P$1 46.45,62.39 v46.43,62.36 | 86.48,62.38 86.48,57.79 86.48,53.6 86.48,48.19 | P83.P$1 142.99,43.13 P73.P$1 C6.2 144.5,43.09 U205.P$20 149.68,45.53 149.68,75.1 v146.25,78.53 P92.P$1 J3.3 | v114.41,61.45 113.62,62.24 107.59,62.24 | 107.59,62.24 113.82,68.48 | 113.82,68.48 117.76,72.42 | 117.76,72.42 117.76,73.54 P66.P$1 117.75,76.53 R283.1 119.26,76.55 C30.2 | 55.88,102.98 86.48,72.38 86.48,62.38 | 55.88,102.98 36.1,102.98 29.85,109.23 | R89.1 118.23,68.51 R87.1 116.79,68.5 R17.1 113.82,68.48 | C16.2 115.19,56.15 111.04,56.15 P55.P$1 107.82,59.37 104.92,59.37 104.92,59.57 | C48.2 103.93,58.59 104.92,59.57 | 104.92,59.57 107.59,62.24 | 117.76,72.42 120.79,72.42 v120.81,72.4
  pour Bottom: 76.1,59.93 76.1,57.16 93.87,57.16 99.05,51.98 104.71,51.98 104.71,58.65 83.7,58.65 82.14,60.21 76.38,60.21
VIB
  Bottom 0.5: Q104.1 114.63,83.88 R280.2 113.39,83.92 R282.2 111.96,85.35 P68.P$1
VIN  (via drill 0.3)
  Top 0.152: 99.02,21.81 99.02,21.55 J11.1 | 99.02,21.81 v99.66,22.45 | J11.1 99.61,20.9 v99.66,20.85 | J11.1 99.66,20.26 v99.66,19.35 | J11.1 99.02,20.01 v98.41,19.4 | J11.1 98.97,20.85 v98.41,20.85 | 99.02,21.81 99.02,21.84 v98.41,22.45
  Bottom 0.152: P2.P$1 106.07,42.82 C51.2
  pour Bottom: 106.21,42.05 111.01,42.05 111.31,42.35 111.31,46.15 111.01,46.45 111.01,47.65 110.91,47.75 110.16,47.75 110.06,47.65 110.06,46.45 108.66,46.45 107.81,47.3 107.81,48.55 107.61,48.75 104.91,48.75 104.51,48.35 104.51,43.3 97.81,36.6 97.81,18.85 98.06,18.6 100.06,18.6 100.26,18.8 100.26,35.3 105.56,40.6 105.56,41.4

## Text on the board
tPlace: P20/SDA | P19/SCL | P20/SDA | ADD:0X38 | P19/SCL | Temperature / & Humidity | LCD | ADD:0X27 | P2 | Servo / Motor | EC-P9 | P0 | TR-P8 | P1 | Vibration Motor | Linear Potentiometer | Ultrasonic Ranging | P16 | P4 | P20/SDA | P19/SCL | ADD:0X5C | LED | HALL | Light | Micro:bit | P3 | PIR | P11 | P20/SDA | RESET | P19/SCL | P13/SCL | P14/DIO | RTC | P13/CS | IR | ADD:0X70 | 4-Digital Display | All-in-one Starter Kit for Micro:bit
bPlace: VIN | USB_D+ | USB_D- | GND | USB_D+ | USB_D- | GND | VIN | V1.0